# Altium PCB 模拟均衡器.PcbDoc
Units mil, origin at the board's own origin, x right, y up, seen from the top; angles counter-clockwise.
Board outline 6000 x 4000 mil, 2 copper layers (Top Layer, Bottom Layer); 161 components, 82 nets, 372 pads, 0 vias.
Unrouted connection lines stored in the file: 273.
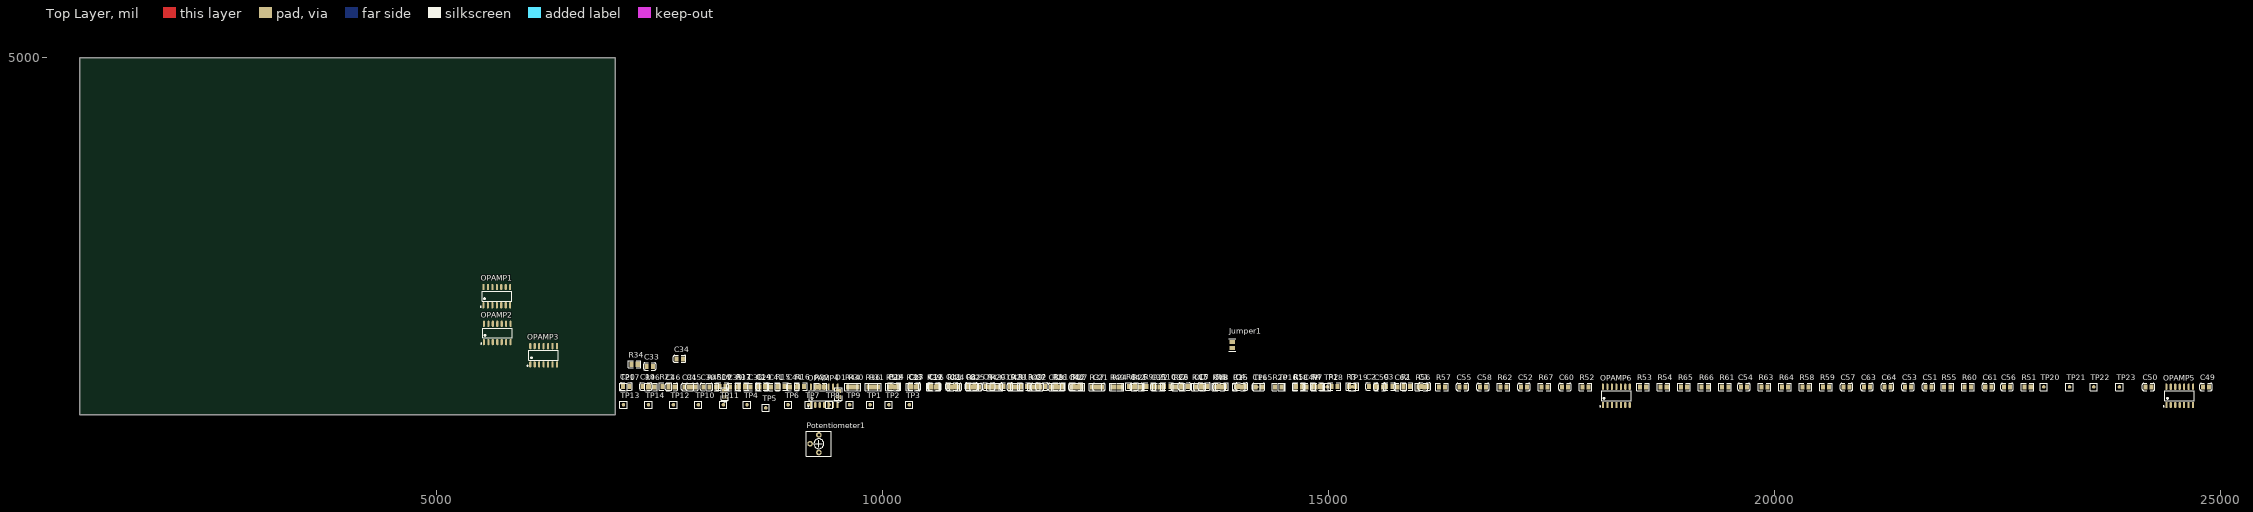
[diagram p0: Top Layer view]
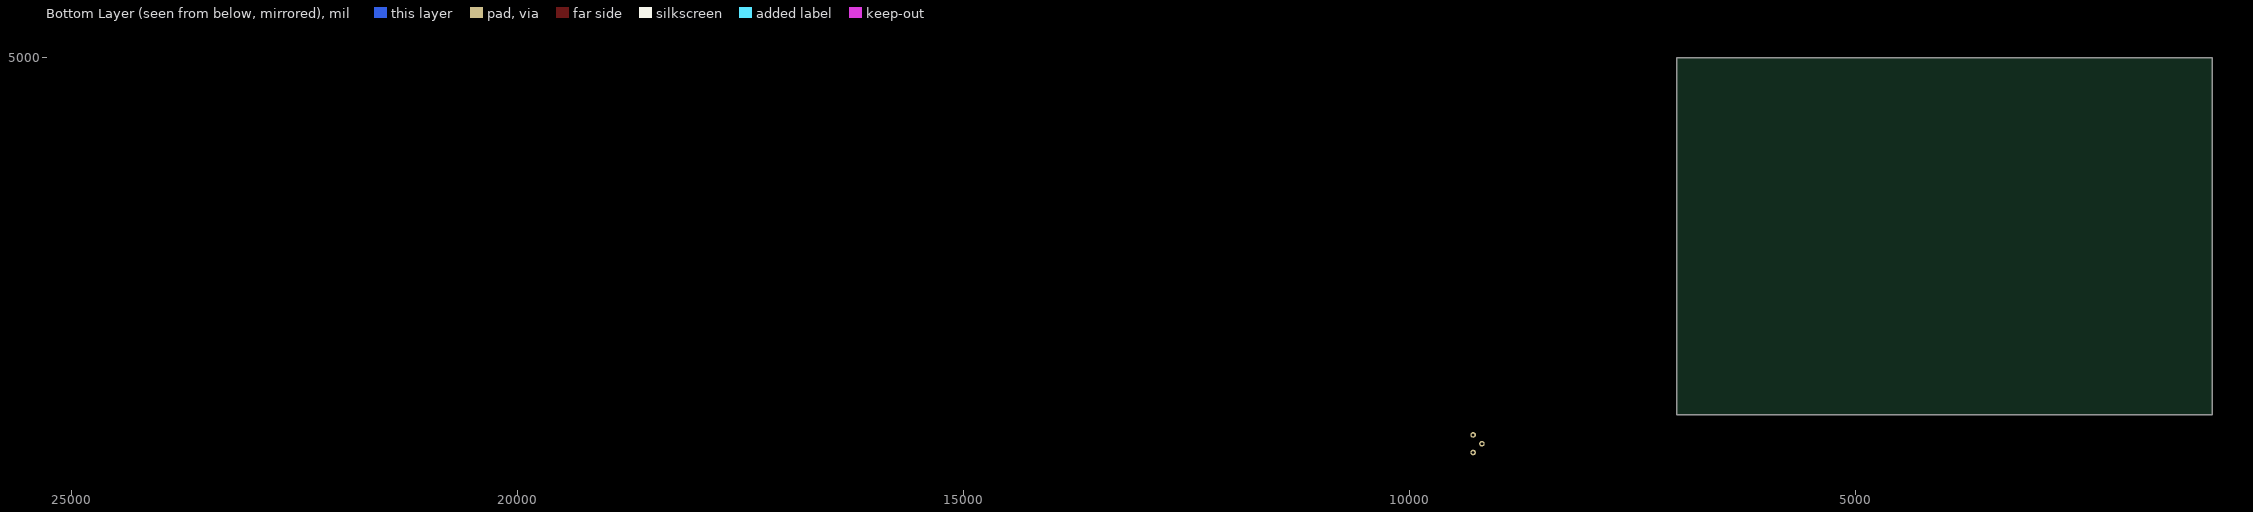
[diagram p1: Bottom Layer view, seen from below]

## Layer stack, top to bottom
Top Solder: solder mask 0.4, Solder Resist, Dk 3.5
Top Layer: signal copper 1.4
Dielectric 1: dielectric 12.6, FR-4, Dk 4.8
Bottom Layer: signal copper 1.4
Bottom Solder: solder mask 0.4, Solder Resist, Dk 3.5

## Board outline
1000,1000 7000,1000 7000,5000 1000,5000

## Design rules (kind name [scope] priority, off if disabled: settings)
Clearance [All] p1: gap=10 ignorepadtopadclearanceinfootprint=FALSE except(0: Arc-Hole Track-Hole SMDPad-Hole THPad-Hole Via-Hole Fill-Hole Poly-Hole Region-Hole Text-Hole)
PolygonConnect [All] p1: connectstyle=Relief reliefconductorwidth=10 reliefentries=4 polygonreliefangle="90 Angle" airgapwidth=10
RoutingVias [All] p1: holewidth=28 width=50 viastyle="Through Hole" minholewidth=28 minwidth=50 maxholewidth=28 maxwidth=50
SolderMaskExpansion [All] p1: expansion=4
Width [All] p1: maxlimit=10 minlimit=10 preferedwidth=10
30 further rules are at their usual default settings.

## Classes and differential pairs
component class 模拟均衡器2: C35 C36 C37 C38 C39 C40 C41 C42 C43 C44 C45 C46 C47 C48 C49 C50 C51 C52 C53 C54 C55 C56 C57 C58 C59 C60 C61 C62 C63 C64 J1 J2 J3 OPAMP4 OPAMP5 OPAMP6 R35 R36 R37 R38 R39 R40 R41 R42 R43 R44 R45 R46 R47 R48 R49 R50 R51 R52 R53 R54 R55 R56 R57 R58 R59 R60 R61 R62 R63 R64 R65 R66 R67 TP15 TP16 TP17 TP18 TP19 TP20 TP21 TP22 TP23
component class 模拟均衡器: C1 C2 C3 C4 C5 C6 C7 C8 C9 C10 C11 C12 C13 C14 C15 C16 C17 C18 C19 C20 C21 C22 C24 C25 C26 C27 C28 C29 C30 C31 C33 C34 D1 D2 Jumper1 OPAMP1 OPAMP2 OPAMP3 Potentiometer1 R1 R2 R3 R4 R5 R6 R7 R8 R9 R10 R11 R12 R13 R14 R15 R16 R17 R18 R19 R20 R21 R22 R23 R24 R25 R26 R27 R28 R29 R30 R31 R32 R33 R34 RCA1 TP1 TP2 TP3 TP4 TP5 TP6 TP7 TP8 TP9 TP10 TP11 TP12 TP13 TP14 TP? XLR1

## Components (designator, comment, footprint, x,y, rotation, side; value= is the part's Value field where it differs from the comment)
C1 "0805,100p" 0805_C 16075,1315 r0 top
C2 "0805,330n" 0805_C 15485,1315 r0 top
C3 "0805,220p" 0805_C 15680,1315 r0 top
C4 "0805,0.01uF" 0805_C 14025,1315 r0 top
C5 "0805,330n" 0805_C 13605,1315 r0 top
C6 "0805,47n" 0805_C 13385,1315 r0 top
C7 "0805,0.01uF" 0805_C 11785,1315 r0 top
C8 "0805,100p" 0805_C 10995,1315 r0 top
C9 "0805,100p" 0805_C 11190,1315 r0 top
C10 "0805,100p" 0805_C 11390,1315 r0 top
C11 "0805,47n" 0805_C 10775,1315 r0 top
C12 "0805,0.01uF" 0805_C 10575,1315 r0 top
C13 "0805,47n" 0805_C 10355,1315 r0 top
C14 "0805,220P" 0805_C 8645,1315 r0 top
C15 "0805,47n" 0805_C 13995,1310 r0 top
C16 "0805,47n" 0805_C 14215,1310 r0 top
C17 "0805,47n" 0805_C 13555,1310 r0 top
C18 "0805,47n" 0805_C 13775,1310 r0 top
C19 "0805,0.01uF" 0805_C 7345,1315 r0 top
C20 "0805,47n" 0805_C 7125,1315 r0 top
C21 "0805,220p" 0805_C 12425,1310 r0 top
C22 "0805,0.01uF" 0805_C 11735,1310 r0 top
C24 "0.01uF" 0805_C 10815,1310 r0 top
C25 "0.1uF" 0805_C 11045,1310 r0 top
C26 "0805,220p" 0805_C 10585,1310 r0 top
C27 "0805" 0805_C 10355,1310 r0 top
C28 "0805" 0805_C 10125,1310 r0 top
C29 "0805,47n" 0805_C 8655,1310 r0 top
C30 "0805,0.01uF" 0805_C 8025,1310 r0 top
C31 "0805,47n" 0805_C 7815,1310 r0 top
C33 "0.01uF" 0805_C 7390,1540 r0 top
C34 "0.1uF" 0805_C 7725.04,1625 r0 top
C35 "0805,0.01uF" 0805_C 13075,1310 r0 top
C36 "0805,0.01uF" 0805_C 8555,1310 r0 top
C37 "0805,47n" 0805_C 13305,1310 r0 top
C38 "0805,47n" 0805_C 11925,1310 r0 top
C39 "0805,47n" 0805_C 8325,1310 r0 top
C40 "0805,C301" 0805_C 12155,1310 r0 top
C41 "0805,C303" 0805_C 8785,1310 r0 top
C42 "0805,120n" 0805_C 12845,1310 r0 top
C43 "0805,220p" 0805_C 11465,1310 r0 top
C44 "0805,C304" 0805_C 8995,1310 r0 top
C45 "0805,47n" 0805_C 7865,1310 r0 top
C46 "0805,47n" 0805_C 7635,1310 r0 top
C47 "0805,120n" 0805_C 14785,1310 r0 top
C49 "0805,0.01uF" 0805_C 24835,1310 r0 top
C50 "0805,0.01uF" 0805_C 24190,1310 r0 top
C51 "0805,0.01uF" 0805_C 21725,1310 r0 top
C52 "0805,0.01uF" 0805_C 17190,1310 r0 top
C53 "0805,10n" 0805_C 21495,1310 r0 top
C54 "0805,10n" 0805_C 19655,1310 r0 top
C55 "0805,10n" 0805_C 16500,1310 r0 top
C56 "0805,10n" 0805_C 22605,1310 r0 top
C57 "0805,10n" 0805_C 20805,1310 r0 top
C58 "0805,10n" 0805_C 16730,1310 r0 top
C59 "0805" 0805_C 15575,1310 r0 top
C60 "0805,4.7n" 0805_C 17650,1310 r0 top
C61 "0805,33n" 0805_C 22395,1310 r0 top
C62 "0805,220n" 0805_C 15805,1310 r0 top
C63 "0805,220n" 0805_C 21035,1310 r0 top
C64 "0805,220n" 0805_C 21265,1310 r0 top
D1 "红灯 0805" 0805_LED_S3 9505,1230 r90 top
D2 "红灯 0805" 0805_LED_S3 8230,1230 r90 top
Jumper1 "Jumper" 0805_J 13920,1780.04 r90 top
OPAMP1 "4277UA" SOIC-14_150mil 5675,2327.64 r0 top
OPAMP2 "4277UA" SOIC-14_150mil 5680,1915 r0 top
OPAMP3 "4277UA" SOIC-14_150mil 6200,1665 r0 top
OPAMP4 "4277UA" SOIC-14_150mil 9345,1210 r0 top
OPAMP5 "4277UA" SOIC-14_150mil 24540,1210 r0 top
OPAMP6 "4277UA" SOIC-14_150mil 18225,1210 r0 top
Potentiometer1 "Potentiometer_3362" 3362P 9285,673.43 r90 top
R1 "0805,5.11K" 0805_R 15875,1315 r0 top
R2 "0805,2.87K" 0805_R 15065,1315 r0 top
R3 "0805,750Ω" 0805_R 15265,1315 r0 top
R4 "0805,5.11K" 0805_R 14870,1315 r0 top
R5 "0805,1.78K" 0805_R 14670,1315 r0 top
R6 "0805,0.1Ω" 0805_R 13805,1315 r0 top
R7 "0805,5.11K" 0805_R 14885,1310 r0 top
R8 "0805,2.87K" 0805_R 12795,1315 r0 top
R9 "0805,1.47K" 0805_R 12990,1315 r0 top
R10 "0805,750Ω" 0805_R 13190,1315 r0 top
R11 "0805,16.2K" 0805_R 11980,1315 r0 top
R12 "0805,1.62K" 0805_R 12175,1315 r0 top
R13 "0805,5.11K" 0805_R 11585,1315 r0 top
R14 "0805,19.6K" 0805_R 10135,1315 r0 top
R15 "0805,4.22K" 0805_R 8865,1315 r0 top
R16 "0805,2.61K" 0805_R 9085,1315 r0 top
R17 "0805,19.6K" 0805_R 8425,1315 r0 top
R18 "0805,19.6K" 0805_R 14665,1310 r0 top
R19 "0805,10K" 0805_R 8205,1315 r0 top
R20 "0805,19.6K" 0805_R 14435,1310 r0 top
R21 "0805,7.5K" 0805_R 7565,1315 r0 top
R22 "0805,38.3K" 0805_R 13095,1310 r0 top
R23 "0805,38.3K" 0805_R 13325,1310 r0 top
R24 "0805,2.37K" 0805_R 12635,1310 r0 top
R25 "0805,2.37K" 0805_R 12865,1310 r0 top
R26 "0805,2.37K" 0805_R 11965,1310 r0 top
R27 "0805,2.37K" 0805_R 12195,1310 r0 top
R28 "0805,1KΩ" 0805_R 11505,1310 r0 top
R29 "0805,4.22K" 0805_R 11275,1310 r0 top
R30 "0805,0.1Ω" 0805_R 9685,1310 r0 top
R31 "0805" 0805_R 9915,1310 r0 top
R32 "0805,2.37K" 0805_R 9305,1310 r0 top
R33 "0805,0.1Ω" 0805_R 8425,1310 r0 top
R34 "0805,1KΩ" 0805_R 7219.96,1565 r0 top
R35 "0805,19.6K" 0805_R 13995,1310 r0 top
R36 "0805,19.6K" 0805_R 9875,1310 r0 top
R37 "0805,R301" 0805_R 12385,1310 r0 top
R38 "0805,R303,1" 0805_R 10335,1310 r0 top
R39 "0805,21.5k" 0805_R 10565,1310 r0 top
R40 "0805,31.6k" 0805_R 12615,1310 r0 top
R41 "0805,1" 0805_R 10795,1310 r0 top
R42 "0805,61.9k" 0805_R 11005,1310 r0 top
R43 "0805,5.11k" 0805_R 11235,1310 r0 top
R44 "0805,1.96k" 0805_R 9645,1310 r0 top
R45 "0805,1k" 0805_R 8095,1310 r0 top
R46 "0805,147k" 0805_R 7405,1310 r0 top
R47 "0805,14.7k" 0805_R 13535,1310 r0 top
R48 "0805,147k" 0805_R 13765,1310 r0 top
R49 "0805,196Ω" 0805_R 11695,1310 r0 top
R50 "0805,640Ω" 0805_R 10105,1310 r0 top
R51 "0805,1.62K" 0805_R 22835,1310 r0 top
R52 "0805,1.62K" 0805_R 17880,1310 r0 top
R53 "0805,1.62K" 0805_R 18525,1310 r0 top
R54 "0805,1.62K" 0805_R 18755,1310 r0 top
R55 "0805,2.87K" 0805_R 21935,1310 r0 top
R56 "0805,1Ω" 0805_R 16040,1310 r0 top
R57 "0805,1Ω" 0805_R 16270,1310 r0 top
R58 "0805,R50" 0805_R 20345,1310 r0 top
R59 "0805,1.62K" 0805_R 20575,1310 r0 top
R60 "0805,5.62k" 0805_R 22165,1310 r0 top
R61 "0805,1.21k" 0805_R 19445,1310 r0 top
R62 "0805,1.33k" 0805_R 16960,1310 r0 top
R63 "0805,5.62k" 0805_R 19885,1310 r0 top
R64 "0805,1Ω" 0805_R 20115,1310 r0 top
R65 "0805,31.6k" 0805_R 18985,1310 r0 top
R66 "0805,196Ω" 0805_R 19215,1310 r0 top
R67 "0805,560Ω" 0805_R 17420,1310 r0 top
TP1 "测试点" TestPoint 9860,1110 r0 top
TP2 "测试点" TestPoint 10070,1110 r0 top
TP3 "测试点" TestPoint 10300,1110 r0 top
TP4 "测试点" TestPoint 8480,1110 r0 top
TP5 "测试点" TestPoint 8690,1075 r0 top
TP6 "测试点" TestPoint 8940,1110 r0 top
TP7 "测试点" TestPoint 9170,1110 r0 top
TP8 "测试点" TestPoint 9400,1110 r0 top
TP9 "测试点" TestPoint 9630,1110 r0 top
TP10 "测试点" TestPoint 7935,1110 r90 top
TP11 "测试点" TestPoint 8215,1110 r90 top
TP12 "测试点" TestPoint 7655,1110 r90 top
TP13 "测试点" TestPoint 7095,1110 r90 top
TP14 "测试点" TestPoint 7375,1110 r90 top
TP15 "测试点" TestPoint 14195,1310 r90 top
TP16 "测试点" TestPoint 14475,1310 r90 top
TP17 "测试点" TestPoint 7095,1310 r90 top
TP18 "测试点" TestPoint 14985,1310 r90 top
TP19 "测试点" TestPoint 15265,1310 r90 top
TP20 "测试点" TestPoint 23015,1310 r90 top
TP21 "测试点" TestPoint 23305,1310 r90 top
TP22 "测试点" TestPoint 23575,1310 r90 top
TP23 "测试点" TestPoint 23865,1310 r90 top

## Footprints (in the part's own frame and the unit in brackets; to place one, negate y for a bottom-side part, rotate by r counter-clockwise, add the part's x,y. Pads: shape width x height; smd on the part's side, far side on the other; paste and mask are expansions set on the pad)
0805_C [mm]
  rect 1.16x1.47 smd: 1(-0.89,0) 2(0.89,0)
  silkscreen extent -1.77,-1.04 1.77,1.04, body extent -1,-0.62 1,0.63, height 0.77
0805_J [mm]
  rect 1.16x1.47 smd: 1(-0.89,0) 2(0.89,0)
  silkscreen extent -1.77,-1.04 1.77,1.03, body extent -1,-0.62 1,0.63, height 0.49
0805_LED_S3 [mm]
  rect 1.16x1.47 smd: A(0.89,0) K(-0.89,0)
  silkscreen extent -2.31,-1.04 1.77,1.03, body extent -1.01,-0.62 1.01,0.62, height 1.1
0805_R [mm]
  rect 1.16x1.47 smd: 1(-0.89,0) 2(0.89,0)
  silkscreen extent -1.77,-1.04 1.77,1.03, body extent -1,-0.62 1,0.63, height 0.49
3362P [mm]
  round 1.6 hole 0.8: 1(-2.5,0) 2(0,2.5) 3(2.5,0)
  silkscreen extent -3.56,-3.56 3.56,3.56, body extent -3.3,-3.3 3.3,3.3, height 4.74
SOIC-14_150mil [mm]
  oval 0.6x1.8 smd: 1(-3.81,-2.6) 2(-2.54,-2.6) 3(-1.27,-2.6) 4(0,-2.6) 5(1.27,-2.6) 6(2.54,-2.6) 7(3.81,-2.6) 8(3.81,2.6) 9(2.54,2.6) 10(1.27,2.6) 11(0,2.6) 12(-1.27,2.6) 13(-2.54,2.6) 14(-3.81,2.6)
  silkscreen extent -4.75,-3.15 4.2,1.4
TestPoint [mm]
  round 1 smd: 1(0,0)
  silkscreen extent -1.02,-1.02 1.02,1.02

## Part data
C1 C2 C3 C5 C6 C8 C9 C10 C11 C13 C14 C15 C16 C17 C18 C20 C21 C24 C25 C26 C29 C31 C33 C34 C37 C38 C39 C45 C46 C53 C54 C55 C56 C57 C58 C59 C60 C61 C62 C63 C64: library part C0805
C4 C7 C12 C19 C22 C27 C28 C30 C35 C36 C40 C41 C42 C43 C44 C47 C49 C50 C51 C52: library part C0805, "0.01uF"
D1 D2: library part "0805 红灯", "发光二极管"
OPAMP1 OPAMP2 OPAMP3 OPAMP4 OPAMP5 OPAMP6: library part OPA4277UA
R1 R2 R3 R4 R5 R6 R7 R8 R9 R10 R11 R12 R13 R14 R15 R16 R17 R18 R19 R20 R21 R22 R23 R24 R25 R26 R27 R28 R29 R30 R31 R32 R33 R34 R35 R36 R37 R38 R39 R40 R41 R42 R43 R44 R45 R46 R47 R48 R49 R50 R51 R52 R53 R54 R55 R56 R57 R58 R59 R60 R61 R62 R63 R64 R65 R66 R67: library part R0805

## Nets (pads, with @x,y where several pads share a name; then routed paths per layer and width w, separated by ;. In a path a pad name is that pad's centre, name@x,y a point inside that pad or via, vN(x,y) a via of type N, cw(c..) or ccw(c..) an arc to the next point about the centre after c; other vN are vias at no path point)
+12: C4.1 C12.1 C22.1 C24.2 C25.2 C35.1 C49.1 C51.1 OPAMP1.4 OPAMP2.4 OPAMP3.4 OPAMP4.4 OPAMP5.4 OPAMP6.4 R28.1
-12: C7.1 C19.1 C30.1 C33.1 C34.1 C36.1 C50.1 C52.1 OPAMP1.11 OPAMP2.11 OPAMP3.11 OPAMP4.11 OPAMP5.11 OPAMP6.11 R34.2
GND: C2.1 C4.2 C7.2 C8.2 C9.2 C10.2 C12.2 C19.2 C20.1 C22.2 C24.1 C25.1 C29.1 C30.2 C31.1 C33.2 C34.2 C35.2 C36.2 C39.2 C41.1 C44.1 C49.2 C50.2 C51.2 C52.2 C55.2 C58.2 D1.K D2.K OPAMP2.5 OPAMP4.5 R11.1 R12.1 R13.1 R19.1 R21.2 R22.1 R23.1 R33.2 R46.2 R47.1 R50.2 R56.1 R58.1 R62.1 R63.1 R67.1
Mid+Tweeter_IN: C17.1 R6.2 R14.1 R19.2 TP4.1 TP7.1
Mid/Twt: C26.1 OPAMP3.1 R27.1 R51.1 TP11.1
NetC1_1: C1.1 OPAMP1.2 R1.1 R4.2
NetC1_2: C1.2 C5.1 Jumper1.1 OPAMP1.1 R1.2 TP1.1
NetC2_2: C2.2 R2.1
NetC3_1: C3.1 OPAMP1.6 R2.2 R5.1
NetC3_2: C3.2 OPAMP1.7 R3.1 R5.2 TP2.1
NetC5_2: C5.2 Jumper1.2 OPAMP1.5 R11.2
NetC6_1: C6.1 R12.2
NetC6_2: C6.2 OPAMP1.10 R3.2
NetC8_1: C8.1 R8.2 R9.1
NetC9_1: C9.1 R9.2 R10.1
NetC10_1: C10.1 OPAMP1.3 R7.2 R10.2 R13.2
NetC11_1: C11.1 C13.1 OPAMP2.1 OPAMP2.2 R15.2 TP5.1
NetC11_2: C11.2 C13.2 R14.2 R17.2
NetC14_2: C14.2 OPAMP2.6 Potentiometer1.2
NetC15_1: C15.1 C16.2 R18.1
NetC15_2: C15.2 OPAMP1.13 OPAMP1.14 R20.2 TP8.1
NetC16_1: C16.1 OPAMP2.10 R23.2
NetC17_2: C17.2 C18.1 R20.1
NetC18_2: C18.2 OPAMP1.12 R22.2
NetC20_2: C20.2 OPAMP2.3 R17.1
NetC21_1: C21.1 OPAMP2.14 R25.1 R26.2 R32.2 TP10.1
NetC21_2: C21.2 OPAMP2.13 R24.1 R25.2
NetC26_2: C26.2 OPAMP3.2 R26.1 R27.2
NetC27_1: C27.1 R30.2 R33.1 TP13.1
NetC27_2: C27.2 OPAMP3.6 OPAMP3.7 TP12.1
NetC28_1: C28.1 R31.2
NetC28_2: C28.2 OPAMP3.5 R30.1
NetC29_2: C29.2 OPAMP2.12 R29.1
NetC31_2: C31.2 OPAMP3.3 R32.1
NetC37_1: C37.1 C38.1 OPAMP4.1 OPAMP4.2 R37.1 R38.1 TP15.1
NetC37_2: C37.2 C38.2 R35.2 R36.1
NetC39_1: C39.1 OPAMP4.3 R36.2
NetC40_1: C40.1 R37.2
NetC40_2: C40.2 C43.1 OPAMP4.6 R39.2 R40.1 R41.1
NetC41_2: C41.2 R38.2 R39.1
NetC42_1: C42.1 R40.2
NetC42_2: C42.2 C43.2 OPAMP4.7 R42.2 R43.1 TP16.1
NetC44_2: C44.2 R41.2 R42.1
NetC45_1: C45.1 C46.2 R45.1
NetC45_2: C45.2 OPAMP4.10 R46.1
NetC46_1: C46.1 R44.1
NetC47_1: C47.1 OPAMP4.13 R47.2 R48.1 TP18.1
NetC47_2: C47.2 OPAMP4.14 R48.2 TP19.1
NetC48_2: R49.2
NetC53_1: C53.1 C54.1 OPAMP3.13 OPAMP3.14 R53.1 TP20.1
NetC53_2: C53.2 C54.2 R51.2 R52.1
NetC55_1: C55.1 OPAMP3.12 R52.2
NetC56_1: C56.1 C57.1 R53.2 R54.1
NetC56_2: C56.2 C57.2 OPAMP6.1 OPAMP6.2 R55.1 TP21.1
NetC58_1: C58.1 OPAMP6.3 R54.2
NetC59_1: C59.1 C60.1 R56.2 R57.1
NetC59_2: C59.2 OPAMP6.6 OPAMP6.7
NetC60_2: C60.2 R59.1
NetC61_1: C61.1 R60.2
NetC61_2: C61.2 OPAMP6.10 R61.2
NetC62_1: C62.1 R61.1 R62.2
NetC62_2: C62.2 OPAMP6.8 OPAMP6.9
NetC63_1: C63.1 OPAMP6.13 R63.2 R64.1 R65.1 TP22.1
NetC63_2: C63.2 C64.2 OPAMP6.14 R65.2 R66.1 TP23.1
NetC64_1: C64.1 R64.2
NetD1_A: D1.A R28.2
NetD2_A: D2.A R34.1
NetJ1_1: R49.1 R50.1
NetJ3_1: R66.2 R67.2
NetLabel207: OPAMP2.8 OPAMP2.9 R18.2 R24.2 R29.2 TP9.1
NetOPAMP1_8: OPAMP1.8 OPAMP1.9 R6.1 TP3.1
NetOPAMP4_8: OPAMP4.8 OPAMP4.9 R45.2 TP17.1
NetOPAMP4_12: OPAMP4.12 R43.2 R44.2
NetOPAMP6_5: OPAMP6.5 R57.2
NetOPAMP6_12: OPAMP6.12 R55.2 R58.2 R59.2 R60.1
NetPotentiometer1_1: Potentiometer1.1 R16.2
NetPotentiometer1_3: Potentiometer1.3 R15.1 R21.1
NetR4_1: R4.1
NetR7_1: R7.1
NetR8_1: R8.1
NetR31_1: R31.1 TP14.1
Woofer_OUT: C14.1 OPAMP2.7 R16.1 R35.1 TP6.1
pads on no net: OPAMP3.8 OPAMP3.9 OPAMP3.10 OPAMP5.1 OPAMP5.2 OPAMP5.3 OPAMP5.5 OPAMP5.6 OPAMP5.7 OPAMP5.8 OPAMP5.9 OPAMP5.10 OPAMP5.12 OPAMP5.13 OPAMP5.14